# EAGLE board Lamp Logic Board_20 (EAGLE 9.5.0)

Size 85.32 x 116.25 mm. Coordinates in mm from the lower left corner, seen from the top.
Outline: 0,0 85.32,0 85.32,116.25 0,116.25 0,0
Copper layers (1*16): Top 0.035mm / dielectric 1.5mm / Bottom 0.035mm
Design rules "default": minimum track width 6mil, minimum drill 0.35mm, track to track 6mil, track to pad 6mil, pad to pad 6mil, via to via 6mil, smd to smd 6mil, copper to edge 40mil, drill to drill 6mil, minimum pad ring 10mil, minimum via ring 8mil, stop-mask expansion 4mil, vias tented up to drill 0mil, thermal gap 10mil

## Footprints (pad centres in the part's own frame; a part is rotated, then mirrored left to right if it is on the bottom)
3X8PINHEAD = drill 1 octagon: 1 0,0; 2 2.54,0; 3 5.08,0; 4 7.62,0; 5 10.16,0; 6 12.7,0; 7 15.24,0; 8 17.78,0; 9 0,-2.54; 10 2.54,-2.54; 11 5.08,-2.54; 12 7.62,-2.54; 13 10.16,-2.54; 14 12.7,-2.54; 15 15.24,-2.54; 16 17.78,-2.54; 17 0,-5.08; 18 2.54,-5.08; 19 5.08,-5.08; 20 7.62,-5.08; 22 12.7,-5.08; 23 15.24,-5.08; 24 17.78,-5.08 | drill 0.7 octagon: 21 10.16,-5.08
SOT223 = smd 1.219 x 2.235: 1 -2.311,-3.099; 2 0,-3.099; 3 2.311,-3.099 | smd 3.6 x 2.2: 4 0,3.099
C0402 = smd 0.7 x 0.9: 1 -0.65,0; 2 0.65,0
C0805 = smd 1.3 x 1.5: 1 -0.95,0; 2 0.95,0
ENP2,0-5 = drill 0.813 pad 1.27 long: 1 -0.953,0; 2 0.953,0
CAP_EEFC_B = smd 2.21 x 1.575: 1 -2.159,0; 2 2.159,0
SOT143 = smd 0.99 x 1.3: 1 -0.76,-1.025 | smd 0.59 x 1.3: 2 0.96,-1.025; 3 0.96,1.025; 4 -0.96,1.025
SOD-123 = smd 1.02 x 0.86: A 1.68,0; C -1.68,0
SMD1,27-2,54 = smd 1.27 x 2.54: 1 0,0
4,1-PAD = drill 4.1 pad 8: B4,1 0,0
4,1-PAD-SQUARE = drill 4.1 pad 9 square: B4,1 0,0
CUI_SJ2-35894D-SMT-TR = smd 2 x 2.15: 1 -3.9,-3.675; 2 3.1,3.675; 3 -0.5,-3.675; 4 -3.9,3.675; 10 5.7,3.675; 11 5,-3.675 | hole 1.4: -3.5,0; 3.5,0
MOLEX_105450-0101 = smd 0.3 x 0.7: A1 -3,3.77; A2 -2.5,3.77; A3 -2,3.77; A4 -1.5,3.77; A5 -1,3.77; A6 -0.5,3.77; A7 0.5,3.77; A8 1,3.77; A9 1.5,3.77; A10 2,3.77; A11 2.5,3.77; A12 3,3.77; B2 2.25,2.47; B3 1.75,2.47; B4 1.25,2.47; B5 0.75,2.47; B6 0.25,2.47; B7 -0.25,2.47; B8 -0.75,2.47; B9 -1.25,2.47; B10 -1.75,2.47; B11 -2.25,2.47 | smd 1 x 0.7: B1 3.1,2.47; B12 -3.1,2.47 | drill 0.6 pad 1.1 long: S1 -4.32,3.36; S2 4.32,3.36 | drill 0.6 pad 1.3 long: S3 -4.32,-2; S4 4.32,-2
CON00218_8 = smd 0.813 x 1.676: 1 2.899,-7.387; 2 1.799,-7.387; 3 0.699,-7.387; 4 -0.401,-7.387; 5 -1.501,-7.387; 6 -2.601,-7.387; 7 -3.701,-7.387; 8 -4.801,-7.387 | smd 1.499 x 1.702: 9 -6.751,7.374; 10 6.751,7.374 | smd 1.295 x 1.397: 11 -6.859,1.577 | smd 1.295 x 1.295: 12 -6.859,-5.823 | smd 1.6 x 1.499: 13 -6.201,-7.476 | smd 1.702 x 1.499: 14 6.449,-7.476
WIZNET_RB1-125BAG1A = drill 0.9: L1 6.325,-3.38; L2 3.784,-4.899; L3 -3.786,-3.379; L4 -6.325,-4.9 | drill 0.9 pad 1.3: R1 -4.446,6.349; R2 -3.176,8.889; R3 -1.906,6.349; R4 -0.636,8.889; R5 0.634,6.349; R6 1.904,8.889; R7 3.174,6.349; R8 4.444,8.889 | drill 1.6 pad 2.184: S1 -7.876,3.049; S2 7.874,3.049 | hole 3.3: 5.714,-0.001; -5.716,-0.001
R1206 = smd 1.6 x 1.803: 1 -1.422,0; 2 1.422,0
0309/12 = drill 0.813 octagon: 1 -6.35,0; 2 6.35,0
TACTILE_SWITCH_SMD_6.0X3.5MM = smd 2.3 x 1.6: 1 -3.15,0; 2 3.15,0
DW20 = smd 1.981 x 0.559: 1 -4.686,5.715; 2 -4.686,4.445; 3 -4.686,3.175; 4 -4.686,1.905; 5 -4.686,0.635; 6 -4.686,-0.635; 7 -4.686,-1.905; 8 -4.686,-3.175; 9 -4.686,-4.445; 10 -4.686,-5.715; 11 4.686,-5.715; 12 4.686,-4.445; 13 4.686,-3.175; 14 4.686,-1.905; 15 4.686,-0.635; 16 4.686,0.635; 17 4.686,1.905; 18 4.686,3.175; 19 4.686,4.445; 20 4.686,5.715
XCVR_ESP32-WROVER-I = smd 1.45 x 0.93: 1 -8.81,8.26; 2 -8.81,6.99; 3 -8.81,5.72; 4 -8.81,4.45; 5 -8.81,3.18; 6 -8.81,1.91; 7 -8.81,0.64; 8 -8.81,-0.63; 9 -8.81,-1.9; 10 -8.81,-3.17; 11 -8.81,-4.44; 12 -8.81,-5.71; 13 -8.81,-6.98; 14 -8.81,-8.25; 15 -8.81,-9.52; 16 -8.81,-10.79; 17 -8.81,-12.06; 18 -8.81,-13.33; 19 -8.81,-14.6; 20 8.81,-14.6; 21 8.81,-13.33; 22 8.81,-12.06; 23 8.81,-10.79; 24 8.81,-9.52; 25 8.81,-8.25; 26 8.81,-6.98; 27 8.81,-5.71; 28 8.81,-4.44; 29 8.81,-3.17; 30 8.81,-1.9; 31 8.81,-0.63; 32 8.81,0.64; 33 8.81,1.91; 34 8.81,3.18; 35 8.81,4.45; 36 8.81,5.72; 37 8.81,6.99; 38 8.81,8.26 | smd 4 x 4: 39 -1.38,0.47
SILABS_CP2102N-A02-GQFN24R = smd 0.9 x 0.3: 1 -1.55,1.75; 2 -1.55,1.25; 3 -1.55,0.75; 4 -1.55,0.25; 5 -1.55,-0.25; 6 -1.55,-0.75; 13 2.55,-0.75; 14 2.55,-0.25; 15 2.55,0.25; 16 2.55,0.75; 17 2.55,1.25; 18 2.55,1.75 | smd 0.3 x 0.9: 7 -0.75,-1.55; 8 -0.25,-1.55; 9 0.25,-1.55; 10 0.75,-1.55; 11 1.25,-1.55; 12 1.75,-1.55; 19 1.75,2.55; 20 1.25,2.55; 21 0.75,2.55; 22 0.25,2.55; 23 -0.25,2.55; 24 -0.75,2.55 | smd 2.55 x 2.55: 25 0.5,0.5
SOT-363 = smd 0.6 x 0.42: 1 -0.95,0.65; 2 -0.95,0; 3 -0.95,-0.65; 4 0.95,-0.65; 5 0.95,0; 6 0.95,0.65
PW14 = smd 1.676 x 0.356: 1 -2.819,1.95; 2 -2.819,1.3; 3 -2.819,0.65; 4 -2.819,0; 5 -2.819,-0.65; 6 -2.819,-1.3; 7 -2.819,-1.95; 8 2.819,-1.95; 9 2.819,-1.3; 10 2.819,-0.65; 11 2.819,0; 12 2.819,0.65; 13 2.819,1.3; 14 2.819,1.95
SOIC127P1034X264-28N = smd 1.981 x 0.559: 1 -4.699,8.255; 2 -4.699,6.985; 3 -4.699,5.715; 4 -4.699,4.445; 5 -4.699,3.175; 6 -4.699,1.905; 7 -4.699,0.635; 8 -4.699,-0.635; 9 -4.699,-1.905; 10 -4.699,-3.175; 11 -4.699,-4.445; 12 -4.699,-5.715; 13 -4.699,-6.985; 14 -4.699,-8.255; 15 4.699,-8.255; 16 4.699,-6.985; 17 4.699,-5.715; 18 4.699,-4.445; 19 4.699,-3.175; 20 4.699,-1.905; 21 4.699,-0.635; 22 4.699,0.635; 23 4.699,1.905; 24 4.699,3.175; 25 4.699,4.445; 26 4.699,5.715; 27 4.699,6.985; 28 4.699,8.255
CM1624-08DE = smd 0.2 x 0.4: CLK 1.075,1.3; CMD 2.275,1.3; DATA0 0.675,1.3; DATA1 0.3,1.3; DATA2 3.075,1.3; DATA3 2.675,1.3; ESD1 1.475,1.3; ESD2 1.475,0.175; ESD3 1.875,0.175; SDCLK 1.075,0.175; SDCMD 2.275,0.175; SDDATA0 0.675,0.175; SDDATA1 0.275,0.175; SDDATA2 3.075,0.175; SDDATA3 2.675,0.175; VCC 1.875,1.3 | smd 3 x 0.35: GND 1.7,0.725
ECS-250-10-37B-CTN-TR = smd 0.85 x 0.75: 1 0.45,0.4; 2 1.8,0.4; 3 1.8,1.45; 4 0.45,1.45
43045-0600 = drill 1.02 square: P$1 3,4.32 | drill 1.02: P$2 0,4.32; P$3 -3,4.32; P$4 3,7.32; P$5 0,7.32; P$6 -3,7.32 | hole 3: 0,0

## Placement (x,y rotation side)
3X8_24_PIN_LED_OUTPUT  3X8PINHEAD  [3X8PINHEAD]  31.35,146.89 0 top  (outside the outline)
5V_TO_3V3_REGULATOR  [SOT223]  65.36,74.17 0 top
C1  0.1uF  [C0402]  -71.12,125.69 0 top  (outside the outline)
C2  1uF  [C0402]  -53.34,132.04 0 top  (outside the outline)
C3  1uF  [C0402]  -58.42,132.04 0 top  (outside the outline)
C4  0.1uF  [C0402]  -77.47,125.69 0 top  (outside the outline)
C5  0.1uF  [C0805]  -49.53,111.72 0 top  (outside the outline)
C6  1uF  [C0402]  -63.5,132.04 0 top  (outside the outline)
C7  1000uF  [ENP2,0-5]  -35.56,111.72 0 top  (outside the outline)
C8  1uF  [CAP_EEFC_B]  -39.37,125.69 0 top  (outside the outline)
C9  1uF  [CAP_EEFC_B]  -46.99,125.69 0 top  (outside the outline)
C10  1uF  [C0402]  -22.86,132.04 0 top  (outside the outline)
C11  10uF  [C0402]  -17.78,132.04 0 top  (outside the outline)
C12  6pF  [C0402]  57.06,93.54 0 top
C13  100uF  [CAP_EEFC_B]  -54.61,125.69 0 top  (outside the outline)
C14  0.1uF  [C0402]  -83.82,125.69 0 top  (outside the outline)
C15  1uF  [C0402]  -33.02,132.04 0 top  (outside the outline)
C16  0.1uF  [C0402]  -90.17,125.69 0 top  (outside the outline)
C17  6pF  [C0402]  57.15,88.54 0 top
C18  1uF  [CAP_EEFC_B]  -62.23,125.69 0 top  (outside the outline)
C19  0.1uF  [C0805]  -55.88,111.72 0 top  (outside the outline)
C20  0.1uF  [C0805]  -62.23,111.72 0 top  (outside the outline)
C21  0.1uF  [C0805]  -68.58,111.72 0 top  (outside the outline)
C22  1uF  [C0402]  20.32,106.29 0 top
C23  1uF  [C0402]  20.24,114.04 0 top
C24  0.1uF  [C0805]  53,57.25 90 top
C25  1uF  [CAP_EEFC_B]  -82.5,-14.25 0 top  (outside the outline)
D1  SP0503BAHTG  [SOT143]  77.4,79.67 180 top
D2  MBR0520LT1G  [SOD-123]  -22.86,111.72 0 top  (outside the outline)
DTR_P  [SMD1,27-2,54]  -73.66,102.83 0 top  (outside the outline)
GND_P  [SMD1,27-2,54]  -59.69,102.83 0 top  (outside the outline)
H1  MOUNT-PAD-ROUND4.1  [4,1-PAD]  79.16,47.93 0 top
H2  MOUNT-PAD-SQUARE4.1  [4,1-PAD-SQUARE]  53.86,47.95 0 top
HEADER_P  [SMD1,27-2,54]  -13.97,91.4 0 top  (outside the outline)
J1  SJ2-35894D-SMT-TR  [CUI_SJ2-35894D-SMT-TR]  8.35,110.47 0 top
J2  105450-0101  [MOLEX_105450-0101]  80.8,72.06 90 top
J5  LLC  [CON00218_8]  9.07,84.95 90 top
MISO_P  [SMD1,27-2,54]  -62.23,91.4 0 top  (outside the outline)
MOSI_P  [SMD1,27-2,54]  -66.04,91.4 0 top  (outside the outline)
P1  RB1-125BAG1A  [WIZNET_RB1-125BAG1A]  54.02,109.07 180 top
R1  330  [R1206]  -73.66,111.72 0 top  (outside the outline)
R2  330  [R1206]  67.97,39.24 270 top
R3  330  [R1206]  62.47,32.82 270 top
R4  330  [R1206]  64.97,32.65 270 top
R5  330  [R1206]  70.59,25.49 270 top
R6  330  [R1206]  68.09,25.57 270 top
R7  330  [R1206]  65.59,19.15 270 top
R8  330  [R1206]  68.09,19.23 270 top
R9  330  [R1206]  70.41,39.19 90 top
R10  330  [R1206]  -40.64,119.34 0 top  (outside the outline)
R11  12k  [R1206]  -45.72,119.34 0 top  (outside the outline)
R12  12k  [R1206]  -50.8,119.34 0 top  (outside the outline)
R13  12k  [R1206]  -55.88,119.34 0 top  (outside the outline)
R14  330  [R1206]  -60.96,119.34 0 top  (outside the outline)
R15  75k  [0309/12]  -27.94,124.42 0 top  (outside the outline)
R16  2.32k  [R1206]  41.03,81.32 90 top
R17  330  [R1206]  -66.04,119.34 0 top  (outside the outline)
R18  330  [R1206]  -71.12,119.34 0 top  (outside the outline)
R19  10k  [R1206]  -76.2,119.34 0 top  (outside the outline)
R20  75  [R1206]  23.16,110.47 90 top
R21  75  [R1206]  17.09,110.36 270 top
R26  330  [R1206]  63,5.25 90 top
R27  330  [R1206]  65.25,5.25 90 top
R28  330  [R1206]  70,11.25 90 top
R29  330  [R1206]  67.5,11.25 270 top
RTS_P  [SMD1,27-2,54]  -81.28,102.83 0 top  (outside the outline)
RX_P  [SMD1,27-2,54]  -13.97,125.69 0 top  (outside the outline)
S1  [TACTILE_SWITCH_SMD_6.0X3.5MM]  69.15,80.77 0 top
SCK_P  [SMD1,27-2,54]  -77.47,102.83 0 top  (outside the outline)
SN74HCT245DWR  SN74HCT245DWR  [DW20]  76.95,59.99 270 top
SN74HCT245DWR1  SN74HCT245DWR  [DW20]  62.25,60 270 top
TX_P  [SMD1,27-2,54]  -17.78,125.69 0 top  (outside the outline)
U1  ESP32-WROVER-IB  [XCVR_ESP32-WROVER-I]  74.89,99.8 0 top
U2  CP2102N-A02-GQFN24R  [SILABS_CP2102N-A02-GQFN24R]  72.9,75.08 180 top
U3  MMDT3904-7-F  [SOT-363]  72.34,68.23 180 top
U4  PCM1808PWR  [PW14]  20.42,100.69 90 top
U$1  ENC28J60/SO  [SOIC127P1034X264-28N]  49.24,88.45 0 top
U$2  CM1624-08DE  [CM1624-08DE]  56.4,69.74 90 top
U$3  ECS-250-10-37B-CTN-TR  [ECS-250-10-37B-CTN-TR]  56,92.28 270 top
VDD3V3_P  [SMD1,27-2,54]  -17.78,91.4 0 top  (outside the outline)
X1  [43045-0600]  52.25,6.75 270 top
X2  [43045-0600]  80.25,34.5 90 top
X3  [43045-0600]  80.25,20.75 90 top
X4  [43045-0600]  80.25,7 90 top
X5  [43045-0600]  52.25,34.25 270 top
X6  [43045-0600]  52.25,20.5 270 top

## Library data of the parts
3X8_24_PIN_LED_OUTPUT = 3X8PINHEAD
5V_TO_3V3_REGULATOR = lm1117; MF: Texas Instruments; MPN: LM1117MP-1.8; OC_FARNELL: 1469053; OC_NEWARK: 41K3467
C1-C6 C10-C12 C14-C17 C19-C24 R1-R21 R26-R29 = resistor
C7 = cap-pan40
C8 C9 C13 C18 C25 = EEE-FC1V1R0R; MANUFACTURER_PART_NUMBER: EEEFC1V1R0R; VENDOR: Panasonic
D1 = SP0503BAHTG; DESCRIPTION: SP050xBA Series 8 V 30 pF Uni-Directional SMT TVS Avalanche Diode Array SOT-143; DIGI-KEY_PART_NUMBER: F2715CT-ND; DIGI-KEY_PURCHASE_URL: https://www.digikey.com/product-detail/en/littelfuse-inc/SP0503BAHTG/F2715CT-ND/1154322?utm_source=snapeda&utm_medium=aggregator&utm_campaign=symbol; MF: Littelfuse Inc.; MP: SP0503BAHTG; PACKAGE: SOT-143 Littelfuse
D2 = Diodes; CREATED_BY: PCBLayout.com; DIGIKEY_PART_NUMBER: MBR0520LT1GOSTR-ND; MANUFACTURER: ON Semiconductor; MPN: MBR0520LT1G; PACKAGE: SOD-123
DTR_P GND_P HEADER_P MISO_P MOSI_P RTS_P RX_P SCK_P TX_P VDD3V3_P = wirepad
H1 H2 = holes
J1 = SJ2-35894D-SMT-TR; CUI_PURCHASE_URL: https://www.cui.com/product/interconnect/connectors/audio-connectors/jacks/sj2-3589x-smt-series?utm_source=snapeda.com&utm_medium=referral&utm_campaign=snapedaBOM; DESCRIPTION: 3.5 mm, Stereo, Right Angle, Surface Mount _SMT_, Audio Jack Connector; DIGI-KEY_PART_NUMBER: CP-SJ2-35894D-SMT-CT-ND; DIGI-KEY_PURCHASE_URL: https://www.digikey.com/product-detail/en/cui-inc/SJ2-35894D-SMT-TR/CP-SJ2-35894D-SMT-CT-ND/6619623?utm_source=snapeda&utm_medium=aggregator&utm_campaign=symbol; MF: CUI Inc.; MP: SJ2-35894D-SMT-TR; PACKAGE: None
J2 = 105450-0101; DESCRIPTION: USB Shielded I/O Receptacle; Type C; Right Angle; Surface Mount; Gold over Nickel; DIGI-KEY_PART_NUMBER: WM12856CT-ND; DIGI-KEY_PURCHASE_URL: https://www.digikey.com/product-detail/en/molex/1054500101/WM12856CT-ND/5843891?utm_source=snapeda&utm_medium=aggregator&utm_campaign=symbol; MF: Molex; MP: 1054500101; PACKAGE: None
J5 = 5027740891; MANUFACTURER_PART_NUMBER: LLC; VENDOR: Molex Connector Corporation
P1 = RB1-125BAG1A; AVAILABILITY: Unavailable; DESCRIPTION: Accessory RJ-45 With Transformer Connector - UDE; MF: WIZnet; MP: RB1-125BAG1A; PACKAGE: HVQFN-36 NXP Semiconductors; PRICE: None
S1 = SparkFun-Switches; PROD_ID: SWCH-00815; SF_SKU: COM-08229
SN74HCT245DWR SN74HCT245DWR1 = SN74HCT245DWR ; MANUFACTURER_PART_NUMBER: SN74HCT245DWR; VENDOR: Texas Instruments
U1 = ESP32-WROVER-I; AVAILABILITY: Unavailable; DESCRIPTION: Module: combo; GPIO, I2C x2, I2S x2, SDIO, SPI x3, UART x3; U.FL; MF: Espressif Systems; MP: ESP32-WROVER-I; PACKAGE: Module Espressif Systems; PRICE: None
U2 = CP2102N-A02-GQFN20R
U3 = MMDT3904; MANUFACTURER_PART_NUMBER: MMDT39047F; VENDOR: Diodes Inc
U4 = PCM1808PWR; MANUFACTURER_PART_NUMBER: PCM1808PWR; VENDOR: Texas Instruments
U$1 = ENC28J60_SO; DESCRIPTION: ENC28J60 Series 3.3 V Stand-Alone Ethernet Controller with SPI Interface-SSOP-28; DIGI-KEY_PART_NUMBER: ENC28J60/SS-ND; DIGI-KEY_PURCHASE_URL: https://www.digikey.com/product-detail/en/microchip-technology/ENC28J60-SS/ENC28J60-SS-ND/857584?utm_source=snapeda&utm_medium=aggregator&utm_campaign=symbol; MF: Microchip; MP: ENC28J60/SS; PACKAGE: SSOP-28 Microchip
U$2 = CM1624-08DE
U$3 = ECS-250-10-37B-CTN-TR
X1-X6 = con-molex-micro-fit-3_0

## Nets
AUDIO_CHANNEL_2: U1.7
BCK: U4.8
D+: D1.4 J2.A6 J2.B6 U2.3
D-: D1.3 J2.A7 J2.B7 U2.4
DOUT: U1.24 U4.9
DTR: R13.1 U2.23 U3.1
EN: DTR_P.1 R10.1 R12.1 U1.3 U3.3 U$1.10
ETHER_CS: U1.8 U$1.9
ETHER_INT: U1.9 U$1.4
GND: 3X8_24_PIN_LED_OUTPUT.1 3X8_24_PIN_LED_OUTPUT.2 3X8_24_PIN_LED_OUTPUT.3 3X8_24_PIN_LED_OUTPUT.4 3X8_24_PIN_LED_OUTPUT.5 3X8_24_PIN_LED_OUTPUT.6 3X8_24_PIN_LED_OUTPUT.7 3X8_24_PIN_LED_OUTPUT.8 5V_TO_3V3_REGULATOR.1 C1.2 C3.2 C5.2 C6.2 C7.1 C8.2 C9.2 C10.2 C11.2 C12.2 C13.2 C14.2 C15.1 C16.1 C17.2 C18.2 C19.2 C20.2 C21.2 D1.1 GND_P.1 H2.B4,1 J1.4 J2.A1 J2.A12 J2.B1 J2.B12 J2.S1 J2.S2 J2.S3 J2.S4 J5.6 J5.9 J5.10 J5.11 J5.13 J5.14 P1.L2 P1.L4 R15.1 R16.2 R19.2 S1.2 SN74HCT245DWR1.10 SN74HCT245DWR.10 SN74HCT245DWR.19 U1.1 U1.15 U1.38 U1.39 U2.2 U2.25 U4.5 U$1.2 U$1.11 U$1.18 U$1.21 U$1.22 U$3.2 U$3.4
HEADER_CS: HEADER_P.1 R1.1 U1.35
LEDA: P1.L1 R18.2
LEDB: P1.L3 R17.2
LEDS1_3V3: SN74HCT245DWR.9 U1.36
LEDS1_5V: 3X8_24_PIN_LED_OUTPUT.9 R2.2
LEDS2_3V3: SN74HCT245DWR.8 U1.12
LEDS2_5V: 3X8_24_PIN_LED_OUTPUT.10 R3.2
LEDS3_3V3: SN74HCT245DWR.7 U1.25 U3.6
LEDS3_5V: 3X8_24_PIN_LED_OUTPUT.11 R4.2
LEDS4_3V3: SN74HCT245DWR.6 U1.26
LEDS4_5V: 3X8_24_PIN_LED_OUTPUT.12 R5.2
LEDS5_3V3: SN74HCT245DWR.5 U1.29
LEDS5_5V: 3X8_24_PIN_LED_OUTPUT.13 R6.2
LEDS6_3V3: RTS_P.1 SN74HCT245DWR.4 U1.30
LEDS6_5V: 3X8_24_PIN_LED_OUTPUT.14 R7.2
LEDS7_3V3: SN74HCT245DWR.3 U1.31
LEDS7_5V: 3X8_24_PIN_LED_OUTPUT.15 R8.2
LEDS8_3V3: SN74HCT245DWR.2 U1.33
LEDS8_5V: 3X8_24_PIN_LED_OUTPUT.16 R9.2
LEDS9_3V3: SN74HCT245DWR1.2
LEDS9_5V: R29.2
LEDS10_3V3: SN74HCT245DWR1.3
LEDS10_5V: R28.2
LEDS11_3V3: SN74HCT245DWR1.4
LEDS11_5V: R27.2
LEDS12_3V3: SN74HCT245DWR1.5
LEDS12_5V: R26.2
LEFT_CHANNEL: R21.2 U4.14
LRCK: U1.23 U4.7
MIC: J1.1
MISO: MISO_P.1 U1.14 U$1.6 U$2.SDDATA0
MOSI: MOSI_P.1 U1.16 U$1.7 U$2.SDCMD
N$1: R9.1 SN74HCT245DWR.18
N$2: C2.1 C4.1 U4.2
N$3: C22.1 J1.3
N$4: C21.1 C23.1 J1.2
N$5: C1.1 C8.1 U2.6
N$6: R8.1 SN74HCT245DWR.17
N$7: R11.1 U3.2
N$8: R13.2 U3.5
N$9: R10.2 S1.1
N$10: R7.1 SN74HCT245DWR.16
N$11: R6.1 SN74HCT245DWR.15
N$12: R5.1 SN74HCT245DWR.14
N$13: R4.1 SN74HCT245DWR.13
N$14: R3.1 SN74HCT245DWR.12
N$15: R2.1 SN74HCT245DWR.11
N$16: C22.2 R20.1
N$17: C15.2 C16.2 U4.1
N$18: R14.1 U2.21
N$19: C11.1 C18.1 U$1.1
N$20: R16.1 U$1.14
N$21: C12.1 U$1.24 U$3.1
N$22: C17.1 U$1.23 U$3.3
N$23: R17.1 U$1.26
N$24: C23.2 R21.1
N$25: R18.1 U$1.27
N$26: R29.1 SN74HCT245DWR1.18
N$27: R28.1 SN74HCT245DWR1.17
N$28: R27.1 SN74HCT245DWR1.16
N$29: R26.1 SN74HCT245DWR1.15
N$30: R19.1 U4.10 U4.11 U4.12
N$35: C24.2 C25.2 SN74HCT245DWR1.19
N$36: C24.1 C25.1 SN74HCT245DWR1.20
RIGHT_CHANNEL: C19.1 C20.1 R20.2 U1.6 U4.13
RTS: R11.2 U2.19 U3.4
RX0: R14.2 RX_P.1 U1.34
SCK: SCK_P.1 U1.13 U$1.8 U$2.SDCLK
SCKI: U1.37 U4.6
SD_CMD: J5.3 U$2.CMD
SD_CS: U$2.SDDATA3
SD_D0: J5.7 U$2.DATA0
SD_D1: J5.8 U$2.DATA1
SD_D2: J5.1 U$2.DATA2
SD_D3: J5.2 U$2.DATA3
SD_SCK: J5.5 U$2.CLK
TPIN+: P1.R7 U$1.13
TPIN-: P1.R8 U$1.12
TPOUT+: P1.R1 U$1.17
TPOUT-: P1.R2 U$1.16
TX_CONTROLLER: R1.2 TX_P.1 U2.20
VDD3V3: 5V_TO_3V3_REGULATOR.2 5V_TO_3V3_REGULATOR.4 C6.1 C10.1 C13.1 C14.1 J5.4 R12.2 U1.2 U4.4 U$1.15 U$1.19 U$1.20 U$1.25 U$1.28 U$2.VCC VDD3V3_P.1
VDD5V: 3X8_24_PIN_LED_OUTPUT.17 3X8_24_PIN_LED_OUTPUT.18 3X8_24_PIN_LED_OUTPUT.19 3X8_24_PIN_LED_OUTPUT.20 3X8_24_PIN_LED_OUTPUT.21 3X8_24_PIN_LED_OUTPUT.22 3X8_24_PIN_LED_OUTPUT.23 3X8_24_PIN_LED_OUTPUT.24 5V_TO_3V3_REGULATOR.3 C2.2 C3.1 C4.2 C5.1 C7.2 C9.1 D2.C H1.B4,1 R15.2 SN74HCT245DWR1.1 SN74HCT245DWR.1 SN74HCT245DWR.20 U4.3
VDD5VUSB: D1.2 D2.A J2.A4 J2.A9 J2.B4 J2.B9 U2.8
VREGIN: U2.7

## Tracks (layer width: path | path; a pad name or v marks a point on that pad's centre or on a via)
D+  (3 unrouted)
D-  (3 unrouted)
DOUT  (1 unrouted)
DTR  (2 unrouted)
EN  (5 unrouted)
ETHER_CS  (1 unrouted)
ETHER_INT  (1 unrouted)
GND  (68 unrouted)
HEADER_CS  (2 unrouted)
LEDA  (1 unrouted)
LEDB  (1 unrouted)
LEDS1_3V3  (1 unrouted)
LEDS1_5V  (1 unrouted)
LEDS2_3V3  (1 unrouted)
LEDS2_5V  (1 unrouted)
LEDS3_3V3  (2 unrouted)
LEDS3_5V  (1 unrouted)
LEDS4_3V3  (1 unrouted)
LEDS4_5V  (1 unrouted)
LEDS5_3V3  (1 unrouted)
LEDS5_5V  (1 unrouted)
LEDS6_3V3  (2 unrouted)
LEDS6_5V  (1 unrouted)
LEDS7_3V3  (1 unrouted)
LEDS7_5V  (1 unrouted)
LEDS8_3V3  (1 unrouted)
LEDS8_5V  (1 unrouted)
LEFT_CHANNEL  (1 unrouted)
LRCK  (1 unrouted)
MISO  (3 unrouted)
MOSI  (3 unrouted)
N$1  (1 unrouted)
N$2  (2 unrouted)
N$3  (1 unrouted)
N$4  (2 unrouted)
N$5  (2 unrouted)
N$6  (1 unrouted)
N$7  (1 unrouted)
N$8  (1 unrouted)
N$9  (1 unrouted)
N$10  (1 unrouted)
N$11  (1 unrouted)
N$12  (1 unrouted)
N$13  (1 unrouted)
N$14  (1 unrouted)
N$15  (1 unrouted)
N$16  (1 unrouted)
N$17  (2 unrouted)
N$18  (1 unrouted)
N$19  (2 unrouted)
N$20  (1 unrouted)
N$21  (2 unrouted)
N$22  (2 unrouted)
N$23  (1 unrouted)
N$24  (1 unrouted)
N$25  (1 unrouted)
N$26  (1 unrouted)
N$27  (1 unrouted)
N$28  (1 unrouted)
N$29  (1 unrouted)
N$30  (3 unrouted)
N$35  (2 unrouted)
N$36  (2 unrouted)
RIGHT_CHANNEL  (4 unrouted)
RTS  (2 unrouted)
RX0  (2 unrouted)
SCK  (3 unrouted)
SCKI  (1 unrouted)
SD_CMD  (1 unrouted)
SD_D0  (1 unrouted)
SD_D1  (1 unrouted)
SD_D2  (1 unrouted)
SD_D3  (1 unrouted)
SD_SCK  (1 unrouted)
TPIN+  (1 unrouted)
TPIN-  (1 unrouted)
TPOUT+  (1 unrouted)
TPOUT-  (1 unrouted)
TX_CONTROLLER  (2 unrouted)
VDD3V3  (16 unrouted)
VDD5V  (21 unrouted)
VDD5VUSB  (6 unrouted)
(copper drawn outside any net)
  shapes: Top area x2